# Allegro board METO_STM_CRY_V0_12.brd
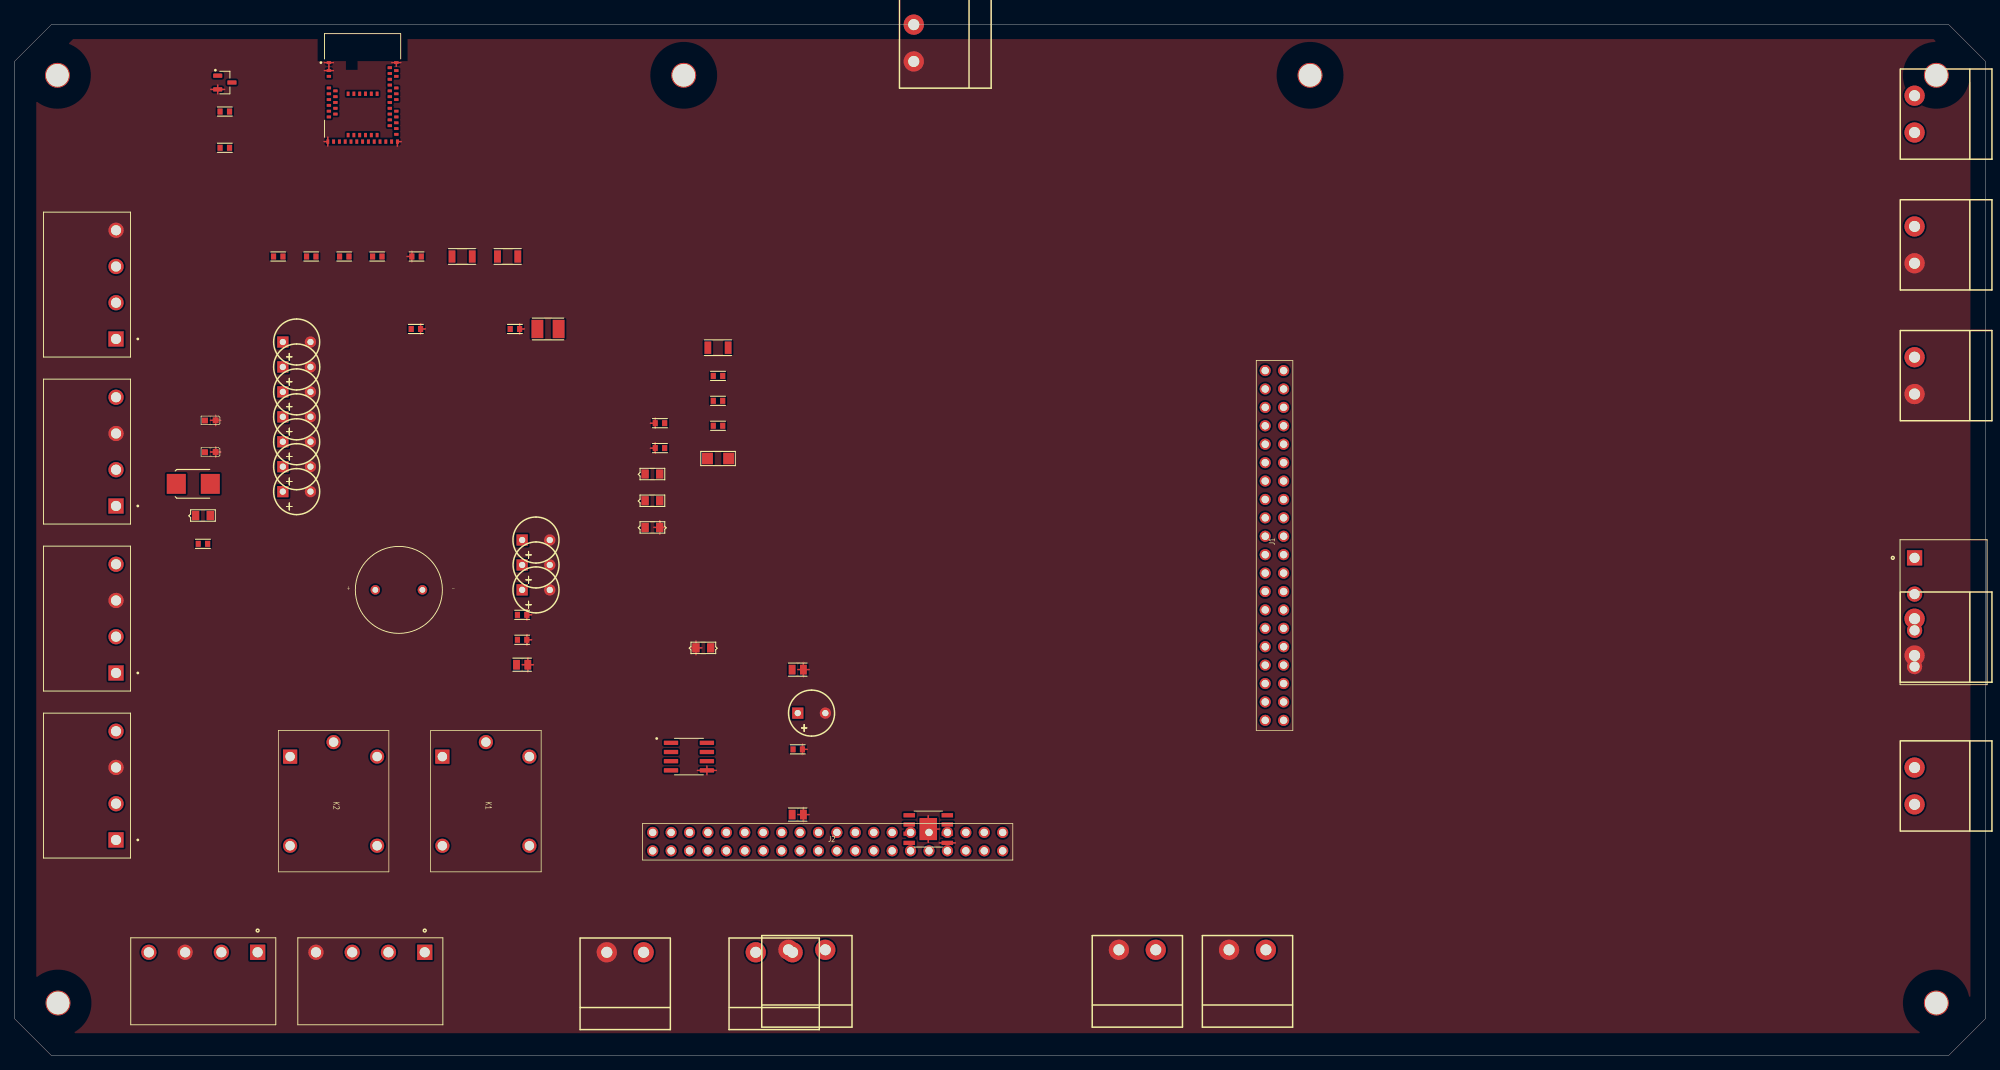
[diagram p0: board, top side]
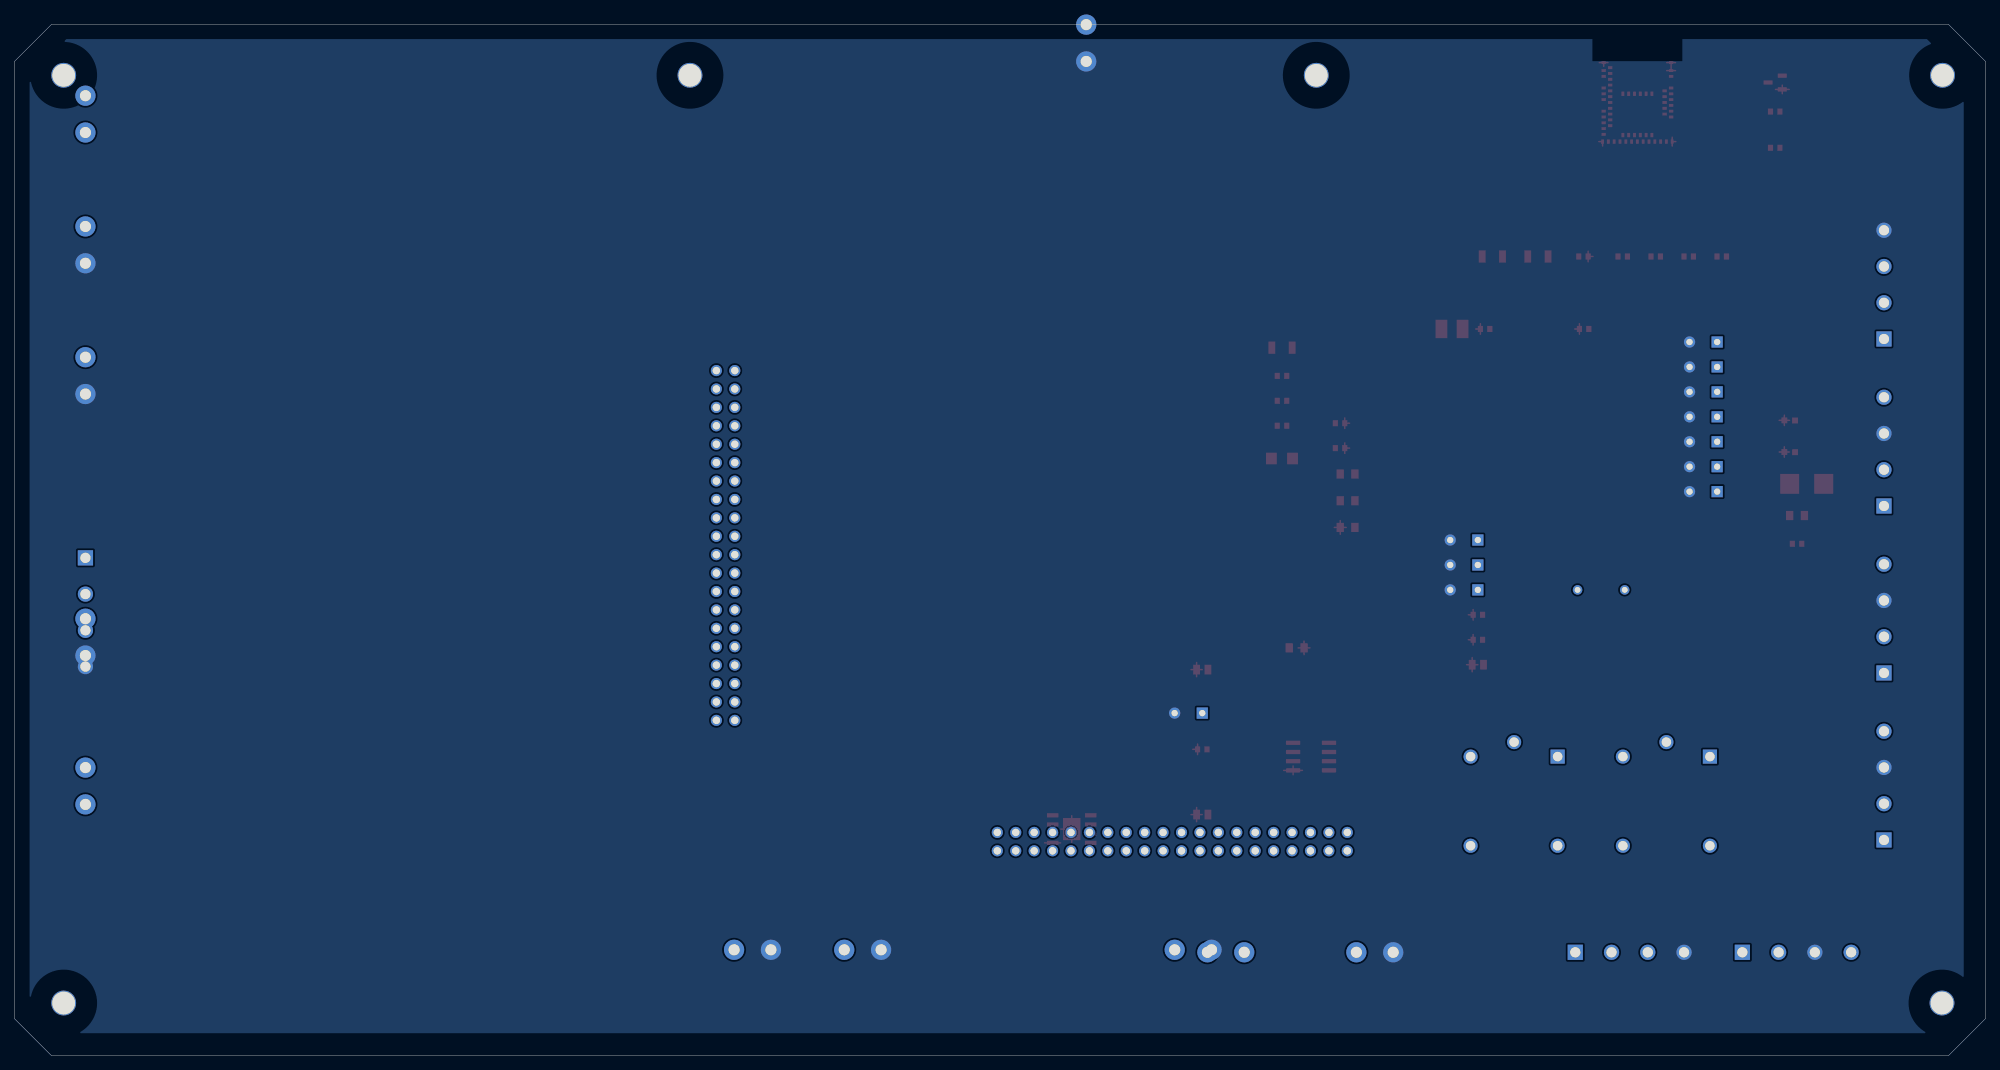
[diagram p1: board, bottom side, seen from below]

Outline 271.78 x 142.24 mm; copper layers: TOP, BOTTOM. Coordinates in mm from the lower left corner of the outline.
Outline path: 0,137.16 0,5.08 5.08,0 266.7,0 271.78,5.08 271.78,137.16 266.7,142.24 5.08,142.24 0,137.16

## Design rules (mm)
constraint set DEFAULT: min track width 0.203

## Placement (name value [footprint] x y rotation side)
C1  CAP POL  [CAPPOL2D250LS150034]  37 98.44 0 top
C2  CAP POL  [CAPPOL2D250LS150034]  37 95 0 top
C3  CAP POL  [CAPPOL2D250LS150034]  37 91.56 0 top
C4  CAP POL  [CAPPOL2D250LS150034]  37 88.12 0 top
C5  CAP POL  [CAPPOL2D250LS150034]  37 84.68 0 top
C6  CAP POL  [CAPPOL2D250LS150034]  37 81.24 0 top
C7  CAP POL  [CAPPOL2D250LS150034]  37 77.8 0 top
C8  CAP POL  [CAPPOL2D250LS150034]  70 71.12 0 top
C9  CAP POL  [CAPPOL2D250LS150034]  70 67.68 0 top
C10  CAP POL  [CAPPOL2D250LS150034]  70 64.24 0 top
C11  CAP POL  [CAPPOL2D250LS150034]  108 47.24 0 top
C12  10u/6V3/CER  [SMC0805]  108 33.24 0 top
C13  100n  [SMC0603]  108 42.24 0 top
C14  10u/6V3/CER  [SMC0805]  108 53.24 0 top
C18  100n  [SMC0603]  70 60.8 0 top
C19  100n  [SMC0603]  70 57.36 0 top
C20  10u/6V3/CER  [SMC0805]  70 53.92 0 top
C21  100n  [SMC0603]  55.34 100.24 0 top
C22  18p  [SMC0603]  89 87.24 0 top
C23  18p  [SMC0603]  89 83.8 0 top
C24  100n  [SMC0603]  69 100.24 0 top
C25  22uF/25V/LowESL  [SMC1210]  73.55 100.24 0 top
D1  1N4148WX  [SMDSOD323SD05T]  88.97 80.23 0 top
D2  1N4148WX  [SMDSOD323SD05T]  88.97 76.54 0 top
D3  SD12C  [SMDSOD323PESD5V]  88.97 72.86 0 top
D4  SD12C  [SMDSOD323PESD5V]  96 56.24 0 top
D5  1N4148WX  [SMDSOD323SD05T]  27 74.5 0 top
D6  LED-BLUE  [LED_0603]  27 87.61 0 top
D7  LED-RED  [LED_0603]  27 83.24 0 top
D8  MBRA340T3  [SMDO214AA21]  27 78.87 0 top
J1  FH_2x20SG  [FH2X20SG]  175 46.24 90 top
J2  FH_2x20SG  [FH2X20SG]  88 28.24 0 top
J3  CON2  [2LI_KLEMENS_200MILS]  140.22 14.58 180 top
J4  CON2  [2LI_KLEMENS_200MILS]  262 115.28 270 top
J5  282811-4  [TE_282811-4]  14 83.32 90 top
J6  CON2  [2LI_KLEMENS_200MILS]  90.15 14.24 180 top
J7  CON2  [2LI_KLEMENS_200MILS]  69.61 14.24 180 top
J8  282811-4  [TE_282811-4]  26.03 14.24 180 top
J9  CON2  [2LI_KLEMENS_200MILS]  94.66 14.58 180 top
J10  282811-4  [TE_282811-4]  14 60.28 90 top
J11  282811-4  [TE_282811-4]  262 61.16 270 top
J12  CON2  [2LI_KLEMENS_200MILS]  155.41 14.58 180 top
J13  282811-4  [TE_282811-4]  14 37.24 90 top
J14  282811-4  [TE_282811-4]  49.07 14.24 180 top
J15  CON2  [2LI_KLEMENS_200MILS]  262 43.12 270 top
J17  CON2  [2LI_KLEMENS_200MILS]  262 97.24 270 top
J19  CON2  [2LI_KLEMENS_200MILS]  262 22.58 270 top
J20  282811-4  [TE_282811-4]  14 106.36 90 top
J21  CON2  [2LI_KLEMENS_200MILS]  262 79.2 270 top
J22  CON2  [2LI_KLEMENS_200MILS]  124 125.09 270 top
K1  JQC-3F-_T73_-1Z-12VDC  [JQC3FT731Z12VDC]  59 41.24 270 top
K2  JQC-3F-_T73_-1Z-12VDC  [JQC3FT731Z12VDC]  38 41.24 270 top
L1  10uH  [SML0603]  25.98 70.6 0 top
LS1  CCG-1206  [CUI_CCG-1206]  53 64.24 0 top
NOREF  -  []  59 41.24 0 top
NOREF#2  -  []  71 28.94 90 top
NOREF#3  -  [unnamed#2]  178.64 135.24 0 top
NOREF#4  -  []  50 28.94 90 top
NOREF#5  -  []  38 41.24 90 top
NOREF#6  -  []  50 41.24 90 top
NOREF#7  -  []  71 41.24 90 top
NOREF#8  -  []  38 28.94 0 top
NOREF#9  -  []  59 41.24 90 top
NOREF#10  -  [unnamed#2]  265 135.24 0 top
NOREF#11  -  []  59 28.94 0 top
NOREF#12  -  []  38 41.24 0 top
NOREF#13  -  [unnamed#2]  265 7.24 0 top
NOREF#14  -  [unnamed#2]  92.28 135.24 0 top
NOREF#15  -  [unnamed#2]  5.92 135.24 0 top
NOREF#16  -  [unnamed#2]  6 7.24 0 top
Q3  BC817  [SOT95P230X110-3N]  29 134.24 0 top
R1  1K  [SMR0603]  29 130.24 0 top
R2  1K  [SMR0603]  29 125.24 0 top
R3  10k  [SMR0603]  36.37 110.24 0 top
R4  10k  [SMR0603]  40.92 110.24 0 top
R5  10k  [SMR0603]  45.47 110.24 0 top
R6  10k  [SMR0603]  50.02 110.24 0 top
R7  10k  [SMR0603]  55.44 110.24 0 top
R8  100R  [SMR1206]  61.72 110.24 0 top
R9  120R  [SMR1206]  68 110.24 0 top
R10  100R  [SMR1206]  97 97.66 0 top
R13  33R  [SMR0603]  97 93.77 0 top
R14  1K  [SMR0603]  97 90.33 0 top
R15  180R  [SMR0603]  97 86.89 0 top
U1  MAX485ESA+  [SOIC127P600X175-8N]  93 41.24 0 top
U2  MDBT50Q-1MV2  [XCVR_MDBT50Q-1MV2]  48 133.24 0 top
U3  AP7165-SPG-13  [SOIC127P600X163-9N]  126 31.24 0 top
Y1  CM315D32768DZFT  [XTAL_CM315_SMD]  97 82.37 0 top

## Library data of the parts
C1-C11 = CAP POL
C12-C14 C18-C23 = CAPACITOR NON-POL
C24 C25 = CAPACITOR NON-POL: room: Vdd5V
D1 D2 D5 = DIODE ZENER: room: Buzzer
D3 D4 = DIODE TVS BI-DIR: room: rs232
D6 D7 = LED
D8 = 1N5819M/CYL
J1 J2 = FH_2x20SG
J3 J4 J6 J7 J9 J12 J15 J17 J19 J21 J22 = CON2
J5 J8 J10 J11 J13 J14 J20 = 282811-4
K1 K2 = JQC-3F-_T73_2
L1 = INDUCTOR
LS1 = CCG-1206: room: Buzzer
Q3 = BC817: room: Buzzer
R1 R2 R8 R10 R13-R15 = RESISTOR/SM_0: room: Buzzer
R3-R7 R9 = RESISTOR/SM_0
U1 = MAX485ESA+
U2 = MDBT50Q-1MV2_0
U3 = AP7165-SPG-13_0
Y1 = CRYSTAL/SM

## Footprints (pads in the part's own frame, mm; a bottom-side part is the same pattern mirrored in y, then rotated)
2LI_KLEMENS_200MILS
  round 2.794 hole 1.524: 1(-17.145,0) 2(-12.065,0)
CAPPOL2D250LS150034
  rect 1.549x1.549 hole 0.864: 1(0,0)
  round 1.549 hole 0.864: 2(3.81,0)
CUI_CCG-1206
  round 1.308 hole 0.8: M(3.25,0) P(-3.25,0)
FH2X20SG
  round 1.53 hole 1.02: 1(0,0) 2(0,2.54) 3(2.54,0) 4(2.54,2.54) 5(5.08,0) 6(5.08,2.54) 7(7.62,0) 8(7.62,2.54) 9(10.16,0) 10(10.16,2.54) 11(12.7,0) 12(12.7,2.54) 13(15.24,0) 14(15.24,2.54) 15(17.78,0) 16(17.78,2.54) 17(20.32,0) 18(20.32,2.54) 19(22.86,0) 20(22.86,2.54) 21(25.4,0) 22(25.4,2.54) 23(27.94,0) 24(27.94,2.54) 25(30.48,0) 26(30.48,2.54) 27(33.02,0) 28(33.02,2.54) 29(35.56,0) 30(35.56,2.54) 31(38.1,0) 32(38.1,2.54) 33(40.64,0) 34(40.64,2.54) 35(43.18,0) 36(43.18,2.54) 37(45.72,0) 38(45.72,2.54) 39(48.26,0) 40(48.26,2.54)
JQC3FT731Z12VDC
  rect 1.95x1.95 hole 1.3: 1(0,0)
  round 1.95 hole 1.3: 2(12.3,0) 3(12.3,12) 4(0,12) 5(-2,6)
LED_0603
  rect 0.813x0.813 smd: 1(-0.737,0) 2(0.737,0.025)
SMC0603
  rect 0.711x0.838 smd: 1(-0.65,0) 2(0.65,0)
SMC0805
  rect 0.94x1.346 smd: 1(-0.78,0) 2(0.78,0)
SMC1210
  rect 1.626x2.54 smd: 1(-1.448,0) 2(1.473,0)
SMDO214AA21
  rect 2.616x2.743 smd: 1(0,0) 2(-4.699,0)
SMDSOD323PESD5V
  rect 1.016x1.27 smd: 1(0,0) 2(-2.032,0)
SMDSOD323SD05T
  rect 1.016x1.27 smd: 1(0,0) 2(-2.032,0)
SML0603
  rect 0.711x0.838 smd: 1(-0.65,0) 2(0.65,0)
SMR0603
  rect 0.711x0.838 smd: 1(-0.65,0) 2(0.65,0)
SMR1206
  rect 0.94x1.702 smd: 1(-1.4,0) 2(1.4,0)
SOIC127P600X163-9N
  rect 1.58x0.59 smd: 1(-2.625,1.905) 2(-2.625,0.635) 3(-2.625,-0.635) 4(-2.625,-1.905) 5(2.625,-1.905) 6(2.625,-0.635) 7(2.625,0.635) 8(2.625,1.905)
  rect 2.41x3.05 smd: 9(0,0)
SOIC127P600X175-8N
  custom 1.97x0.59 smd: 1(-2.475,1.905) 2(-2.475,0.635) 3(-2.475,-0.635) 4(-2.475,-1.905) 5(2.475,-1.905) 6(2.475,-0.635) 7(2.475,0.635) 8(2.475,1.905)
SOT95P230X110-3N
  custom 1.26x0.59 smd: 1(-0.98,0.95) 2(-0.98,-0.95) 3(0.98,0)
TE_282811-4
  rect 2.1x2.1 hole 1.4: 1(-7.5,0)
  round 2.1 hole 1.4: 2(-2.5,0) 3(2.5,0) 4(7.5,0)
unnamed#2
  round 3.429 hole 3.124: (0,0)
XCVR_MDBT50Q-1MV2
  rect 0.6x0.4 smd: 1(-4.65,3.75) 2(-4.65,2.65) 3(-4.65,1.85) 4(-4.65,0.25) 5(-3.75,-0.15) 6(-4.65,-0.55) 7(-3.75,-0.95) 8(-4.65,-1.35) 9(-3.75,-1.75) 10(-4.65,-2.15) 11(-3.75,-2.55) 12(-4.65,-2.95) 13(-3.75,-3.35) 14(-4.65,-3.75) 34(4.65,-6.15) 35(4.65,-5.35) 36(3.75,-4.95) 37(4.65,-4.55) 38(3.75,-4.15) 39(4.65,-3.75) 40(3.75,-3.35) 41(4.65,-2.95) 42(3.75,-2.55) 43(3.75,-1.75) 44(4.65,-1.35) 45(3.75,-0.95) 46(4.65,-0.55) 47(3.75,-0.15) 48(4.65,0.25) 49(3.75,0.65) 50(3.75,1.45) 51(4.65,1.85) 52(3.75,2.25) 53(4.65,2.65) 54(3.75,3.05) 55(4.65,3.75)
  rect 0.4x0.6 smd: 15(-4.8,-7.15) 16(-4,-7.15) 17(-3.2,-7.15) 18(-2.4,-7.15) 19(-2,-6.25) 20(-1.6,-7.15) 21(-1.2,-6.25) 22(-0.8,-7.15) 23(-0.4,-6.25) 24(0,-7.15) 25(0.4,-6.25) 26(0.8,-7.15) 27(1.2,-6.25) 28(1.6,-7.15) 29(2,-6.25) 30(2.4,-7.15) 31(3.2,-7.15) 32(4,-7.15) 33(4.8,-7.15) 56(-2,-0.55) 57(-1.2,-0.55) 58(-0.4,-0.55) 59(0.4,-0.55) 60(1.2,-0.55) 61(2,-0.55)
XTAL_CM315_SMD
  rect 1.499x1.6 smd: 1(-1.453,0) 2(1.463,0)

## Nets
3.3V: C14.1 C18.1 C19.1 C20.1 L1.2 U2.28 U2.30(VDDH) U2.32
GND: C1.2 C2.2 C3.2 C4.2 C5.2 C6.2 C7.2 C8.2 C9.2 C10.2 C11.2 C12.2 C13.2 C14.2 C18.2 C19.2 C20.2 C21.2 C22.1 C23.1 C24.2 D3.1 D4.2 D6.2(CATHODE) D7.2(CATHODE) J3.2 J5.3 J7.2 J8.3 J9.2 J10.3 J11.4 J12.2 J13.3 J14.4 J15.2 J17.2 J20.4 J21.2 J22.2 Q3.2(E) R7.1 U1.5 U2.1 U2.2 U2.15 U2.33 U2.55 U3.5 U3.9
VDD5VIN: C12.1 C13.1 C24.1 D1.2(CATHODE) D2.2(CATHODE) J11.1 J14.1 J20.3 K1.1 K2.1 R3.1 R4.1 R5.1 R6.1 R13.2 U1.8(VCC) U3.1 U3.2
485_A: D3.2 R3.2 R8.1 R9.1
485_B: D4.1 R9.2 R10.1
BUZZER: R15.1 U2.22
CON_A_PIN_1: J1.1
CON_A_PIN_2: J1.2
CON_A_PIN_3: J1.3
CON_A_PIN_4: C11.1 J1.4 J22.1
CON_A_PIN_5: J1.5
CON_A_PIN_6: J1.6
CON_A_PIN_7: J1.7
CON_A_PIN_9: J1.9
CON_A_PIN_10: J1.10
CON_A_PIN_11: J1.11
CON_A_PIN_12: J1.12
CON_A_PIN_13: J1.13
CON_A_PIN_14: J1.14
CON_A_PIN_15: J1.15 J1.25
CON_A_PIN_16: J1.16
CON_A_PIN_17: J1.17 J1.27
CON_A_PIN_18: J1.18
CON_A_PIN_19: J1.8 J1.19 J1.20 J1.22 J2.9 J2.20 J2.32
CON_A_PIN_21: J1.21
CON_A_PIN_23: J1.23
CON_A_PIN_24: J1.24
CON_A_PIN_26: J1.26
CON_A_PIN_28: C6.1 J1.28 J17.1
CON_A_PIN_29: J1.29
CON_A_PIN_30: J1.30
CON_A_PIN_31: J1.31
CON_A_PIN_32: C10.1 J1.32 J21.1
CON_A_PIN_33: J1.33
CON_A_PIN_34: J1.34 J13.1
CON_A_PIN_35: J1.35
CON_A_PIN_36: J1.36
CON_A_PIN_37: J1.37
CON_A_PIN_38: J1.38 R1.1
CON_A_PIN_39: J1.39
CON_A_PIN_40: J1.40
CON_B_PIN_1: C5.1 J2.1 J15.1
CON_B_PIN_2: C2.1 J2.2 J7.1
CON_B_PIN_3: J2.3 J11.2 U2.37
CON_B_PIN_4: J2.4
CON_B_PIN_5: J2.5 J11.3 U2.36
CON_B_PIN_6: J2.6 J14.2 R6.2 U1.1
CON_B_PIN_7: J2.7
CON_B_PIN_8: J2.8
CON_B_PIN_10: J2.10
CON_B_PIN_11: C4.1 J2.11 J12.1
CON_B_PIN_12: J2.12
CON_B_PIN_13: J2.13
CON_B_PIN_14: J2.14 R2.1
CON_B_PIN_15: J2.15
CON_B_PIN_16: J2.16
CON_B_PIN_17: C3.1 J2.17 J9.1
CON_B_PIN_18: C8.1 J2.18
CON_B_PIN_19: C1.1 J2.19 J3.1
CON_B_PIN_21: J2.21 J5.4 J8.4 J10.4 J13.4
CON_B_PIN_22: J2.22
CON_B_PIN_23: J2.23 J10.2
CON_B_PIN_24: J2.24 J13.2
CON_B_PIN_25: J2.25 J8.2
CON_B_PIN_26: J2.26
CON_B_PIN_27: J2.27 J5.2
CON_B_PIN_28: J2.28
CON_B_PIN_29: J2.29 J10.1
CON_B_PIN_30: J2.30
CON_B_PIN_31: J2.31 J8.1
CON_B_PIN_33: J2.33 J5.1
CON_B_PIN_34: J2.34 J14.3 R4.2 U1.4
CON_B_PIN_35: J2.35
CON_B_PIN_36: J2.36
CON_B_PIN_37: J2.37
CON_B_PIN_38: J2.38
CON_B_PIN_39: J2.39
CON_B_PIN_40: J2.40
DBG_LED_1: U2.42
DBG_LED_2: U2.44
ENCODER_A: C7.1 J20.1 U2.60
ENCODER_B: C9.1 J20.2 U2.56
FGND: C25.2 J19.2
NRESET: C21.1 U2.40
RELAY1_1: J4.1 K1.5 K2.5
RELAY1_2: J4.2 K1.2 K2.2
RELAY2_1: J6.1
RELAY2_2: J6.2
SWCLK: U2.53
SWDIO: U2.51
UC_OSC_IN: C22.2 U2.17 Y1.2
UC_OSC_OUT: C23.2 U2.18 Y1.1
VDC_5V: D8.1 J19.1
N8883662: D5.1 LS1.M Q3.3 R14.1
N8883700: D5.2(CATHODE) LS1.P R13.1 R14.2
N9062725: L1.1 U2.31
N9076286: D8.2(CATHODE)
N9076290: C25.1
N9079599: U3.7 U3.8
N9079749: U3.3(POK)
N9079753: U3.6
N9079813: U3.4
N9092651: D1.1 K1.4
N9092718: R1.2
N9093131: D2.1 K2.4
N9093215: R2.2
N9096482: R7.2 U1.2
N9096486: R5.2 U1.3
N9096991: R8.2 U1.6
N9096995: R10.2 U1.7
N90510690: Q3.1 R15.2
N90714391: D6.1
N90750741: D7.1

Pads without a net: K1 3; K2 3; U2 3 4 5 6 7 8 9 10 11 12 13 14 16 19 20 21 23 24 25 26 27 29 34 35 38 39 41 43 45 46 47 48 49 50 52 54 57 58 59 61

## Routing (per net, layer and track width the routed paths; a pad name or vN(x,y) marks a point on that pad's centre or on a via; arc(x,y) is an arc through that point)
GND: length 62.3
  TOP w0.203: Q3.2 28.95,133.29 ; Q3.2 28.02,132.69 ; Q3.2 28.02,133.89 ; Q3.2 27.09,133.29 ; 70.01,53.92 C20.2 ; C20.2 70.78,52.94 ; C20.2 70.78,54.9 ; C20.2 71.55,53.92 ; U2.2 43.35,136.39 ; U2.2 43.95,135.89 ; U2.2 42.75,135.89 ; 27.74,82.55 D7.2 ; D7.2 27.03,83.27 ; D7.2 28.45,83.27 ; D7.2 27.74,83.98 ; 87.69,83.8 C23.1 ; C23.1 88.35,83.08 ; C23.1 88.35,84.52 ; C13.2 108.65,42.96 ; C13.2 108.65,41.52 ; C13.2 109.31,42.24 ; 88.97,71.92 D3.1 ; D3.1 89.79,72.86 ; D3.1 88.97,73.8 ; D3.1 88.16,72.86 ; C19.2 71.31,57.36 ; C19.2 70.65,56.64 ; C19.2 70.65,58.08 ; C12.2 108.78,34.22 ; C12.2 109.55,33.24 ; C12.2 108.01,33.24 ; C12.2 108.78,32.26 ; 53.3,126.09 U2.33 52.8,125.49 ; U1.5 95.47,39.94 ; U1.5 95.47,38.74 ; U1.5 96.76,39.34 ; U1.5 94.18,39.34 ; 88.35,86.52 C22.1 ; C22.1 87.69,87.24 ; C22.1 88.35,87.96 ; 42.75,136.99 U2.1 ; U2.1 43.95,136.99 ; U2.1 43.35,136.49 ; U3.9 126,33.07 ; U3.9 126,29.41 ; U3.9 127.51,31.24 ; D6.2 27.74,88.35 ; D6.2 27.03,87.63 ; D6.2 28.45,87.63 ; D6.2 27.74,86.92 ; C18.2 70.65,61.52 ; C18.2 71.31,60.8 ; C18.2 70.65,60.08 ; 54.79,109.52 R7.1 ; R7.1 54.13,110.24 ; R7.1 54.79,110.96 ; 52.65,136.49 U2.55 ; U2.55 52.05,136.99 ; U2.55 53.25,136.99 ; 93.15,56.24 D4.2 ; D4.2 93.97,57.18 ; D4.2 94.78,56.24 ; D4.2 93.97,55.3 ; C21.2 56.65,100.24 ; C21.2 55.99,99.52 ; C21.2 55.99,100.96 ; C14.2 108.78,54.22 ; C14.2 108.78,52.26 ; C14.2 108.01,53.24 ; C14.2 109.55,53.24 ; 129.72,29.34 U3.5 127.53,29.34 ; C24.2 70.31,100.24 ; C24.2 69.65,99.52 ; C24.2 69.65,100.96 ; U2.15 43.2,126.69 ; U2.15 43.2,125.49 ; U2.15 42.7,126.09

## Copper pours and planes (outline as drawn; the poured copper is in the pictures)
GND on TOP, BOTTOM: 8.08,3.08 264.62,3.08 269.7,8.16 269.7,135.16 264.62,140.24 8.08,140.24 3,135.16 3,8.16
